# Altium PCB Stlink.PcbDoc
Units mm, origin at the board's own origin, x right, y up, seen from the top; angles counter-clockwise.
Board outline 55.65 x 12.8 mm, 2 copper layers (Top Layer, Bottom Layer); 34 components, 32 nets, 118 pads, 87 vias.
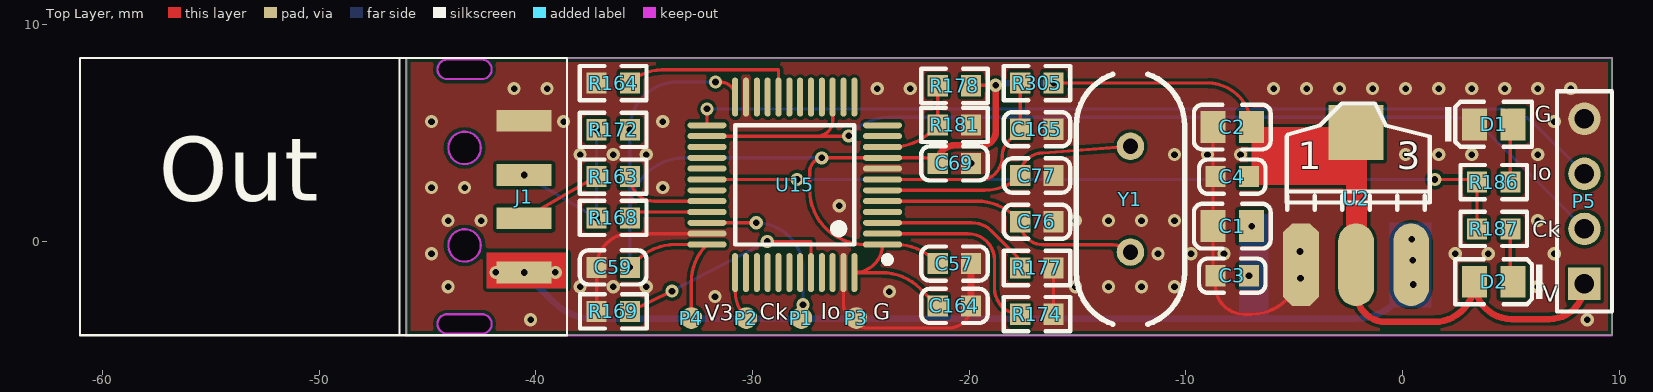
[diagram p0: Top Layer view]
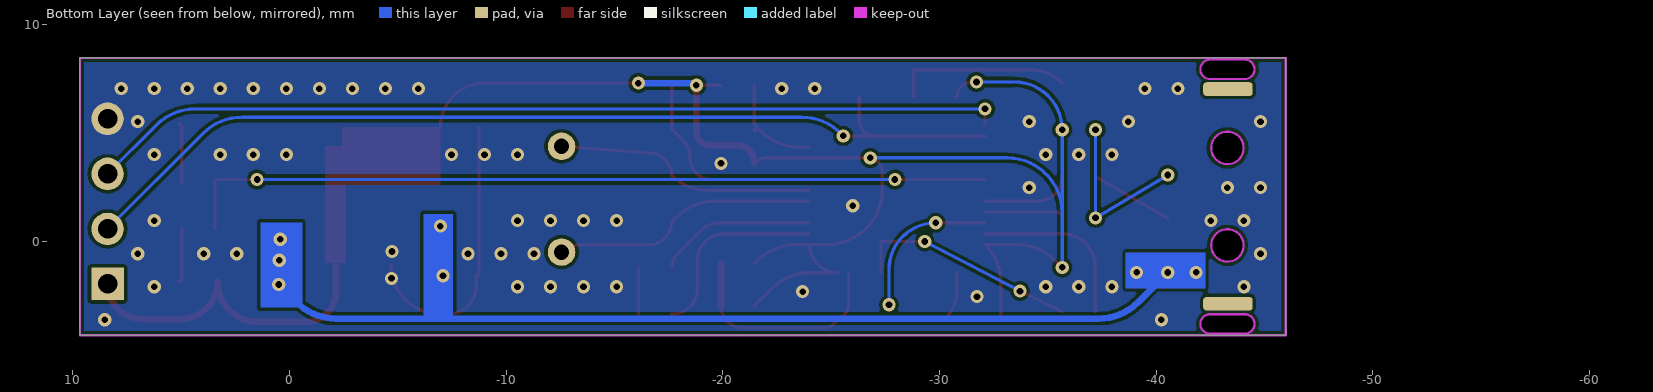
[diagram p1: Bottom Layer view, seen from below]
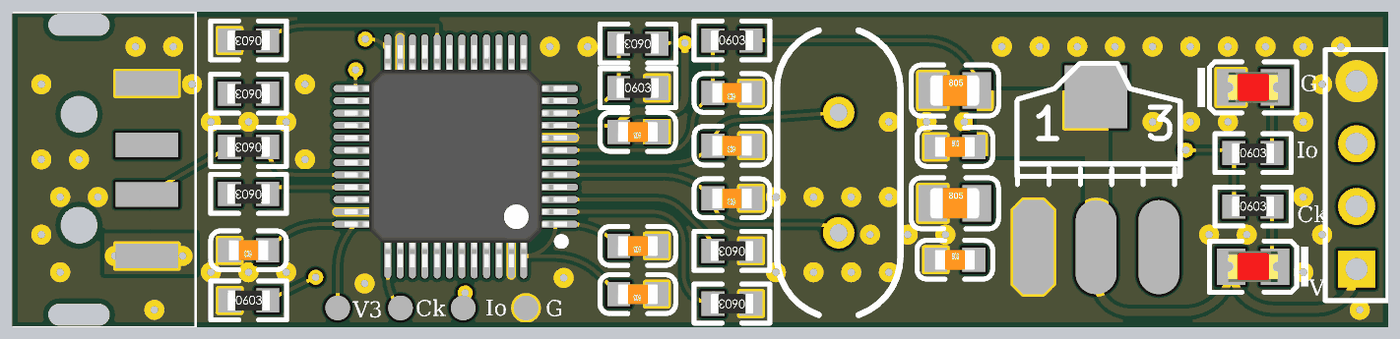
[diagram p2: 3D render of the assembled board from above, using the file's embedded part models]

## Layer stack, top to bottom
Top Solder: solder mask 0.0102, Solder Resist, Dk 3.5
Top Layer: signal copper 0.0356
Dielectric 1: dielectric 0.32, FR-4, Dk 4.8
Bottom Layer: signal copper 0.0356
Bottom Solder: solder mask 0.0102, Solder Resist, Dk 3.5

## Board outline
-45.974,-4.328 9.677,-4.328 9.677,8.472 -45.974,8.472

## Design rules (kind name [scope] priority, off if disabled: settings)
Clearance [All] p1: gap=0.152 ignorepadtopadclearanceinfootprint=FALSE
MinimumSolderMaskSliver [All] p1: minsoldermaskwidth=0
PolygonConnect [All] p1: connectstyle=Direct reliefconductorwidth=0.254 reliefentries=4 polygonreliefangle="90 Angle" airgapwidth=0.254
RoutingVias [All] p1: holewidth=0.305 width=0.61 viastyle="Through Hole" minholewidth=0.305 minwidth=0.61 maxholewidth=0.711 maxwidth=1.27
SilkToSilkClearance [All] p1: silktosilkclearance=0
SilkToSolderMaskClearance [IsPad] p1: minsilkscreentomaskgap=0 clearancetoexposedcopper=TRUE
SolderMaskExpansion [All] p1: expansion=0.102
Width [All] p1: maxlimit=25.4 minlimit=0.152 preferedwidth=0.152
27 further rules are at their usual default settings.

## Components (designator, comment, footprint, x,y, rotation, side; value= is the part's Value field where it differs from the comment)
C1 "10uF" 0805_C -7.849,0.711 r0 top
C2 "10uF" 0805_C -7.849,5.283 r0 top
C3 "100nF" 0603_C -7.849,-1.575 r0 top
C4 "100nF" 0603_C -7.849,2.997 r0 top
C57 "100nF" 0603_C -20.676,-1.016 r180 top
C59 "100nF" 0603_C -36.424,-1.194 r180 top value=10nF
C69 "100nF" 0603_C -20.676,3.607 r180 top
C76 "20pF" 0603_C -16.866,0.914 r180 top
C77 "20pF" 0603_C -16.866,3.048 r180 top
C164 "100nF" 0603_C -20.676,-2.972 r180 top
C165 "100nF" 0603_C -16.866,5.182 r180 top
D1 "红灯 0805" 0805_LED_S1 4.216,5.41 r0 top
D2 "翠绿 0805" 0805_LED_S1 4.216,-1.854 r180 top
J1 "Usba" UsbA -43.282,-0.178 r0 top
P1 "Point" POINT -27.737,-3.531 r0 top
P2 "Point" POINT -30.277,-3.531 r0 top
P3 "Point" POINT -25.197,-3.531 r0 top
P4 "Point" POINT -32.817,-3.531 r0 top
P5 "Header 4" HDR1X4 8.407,-1.956 r90 top
R163 "0" 0603_R -36.424,2.997 r180 top value=1K
R164 "100K" 0603_R -36.424,7.315 r180 top
R168 "0" 0603_R -36.424,1.092 r180 top value=1K
R169 "100K" 0603_R -36.416,-3.226 r0 top
R172 "1K5" 0603_R -36.424,5.156 r180 top value=1K
R174 "10K" 0603_R -16.866,-3.353 r180 top
R177 "[N/A]" 0603_R -16.866,-1.219 r180 top
R178 "4K7" 0603_R -20.676,7.188 r180 top
R181 "4K7" 0603_R -20.676,5.385 r0 top
R186 "100" 0603_R 4.216,2.743 r0 top value=1K
R187 "100" 0603_R 4.216,0.584 r0 top value=1K
R305 "100K" 0603_R -16.866,7.315 r0 top
U2 "AMS1117-3.3" AMS1117 -4.674,-1.065 r0 top
U15 "STM32F103C8T6" LQFP-48_7x7x05P -28.042,2.616 r90 top
Y1 "8MHz" XTAL_US -12.548,4.394 r270 top

## Footprints (in the part's own frame and the unit in brackets; to place one, negate y for a bottom-side part, rotate by r counter-clockwise, add the part's x,y. Pads: shape width x height; smd on the part's side, far side on the other; paste and mask are expansions set on the pad)
0603_C [mm]
  rect 0.93x0.98 smd: 1(-0.77,0) 2(0.77,0)
  silkscreen extent -1.53,-0.79 1.54,0.79, body extent -0.8,-0.4 0.8,0.4, height 0.3
0603_R [mm]
  rect 0.93x0.98 smd: 1(-0.77,0) 2(0.77,0)
  silkscreen extent -1.53,-0.79 1.54,0.79, body extent -0.85,-0.4 0.85,0.4, height 0.56
0805_C [mm]
  rect 1.16x1.47 smd: 1(-0.89,0) 2(0.89,0)
  silkscreen extent -1.77,-1.04 1.77,1.04, body extent -1,-0.62 1,0.63, height 0.77
0805_LED_S1 [mm]
  rect 1.16x1.47 smd: A(0.89,0) K(-0.89,0)
  silkscreen extent -2.24,-1.04 1.77,1.03, body extent -1.01,-0.62 1.01,0.62, height 1.1
AMS1117 [mil]
  oct 65x150 smd: 1(0.03,-0.06)
  oval 65x150 smd: 2(100.03,-0.06) 3(200.03,-0.06)
  rect 100x100 smd: 4(100.03,239.94)
  silkscreen extent -26,100 234,293
HDR1X4 [mm] "Connector; Header; 4 Position"
  rect 1.5x1.5 hole 0.9: 1(0,0)
  round 1.5 hole 0.9: 2(2.54,0) 3(5.08,0) 4(7.62,0)
  silkscreen extent -1.27,-1.27 8.89,1.27
LQFP-48_7x7x05P [mm]
  oval 0.28x1.8 smd mask+0.051: 1(-2.75,-4.05) 2(-2.25,-4.05) 3(-1.75,-4.05) 4(-1.25,-4.05) 5(-0.75,-4.05) 6(-0.25,-4.05) 7(0.25,-4.05) 8(0.75,-4.05) 9(1.25,-4.05) 10(1.75,-4.05) 11(2.25,-4.05) 12(2.75,-4.05) 25(2.75,4.05) 26(2.25,4.05) 27(1.75,4.05) 28(1.25,4.05) 29(0.75,4.05) 30(0.25,4.05) 31(-0.25,4.05) 32(-0.75,4.05) 33(-1.25,4.05) 34(-1.75,4.05) 35(-2.25,4.05) 36(-2.75,4.05)
  oval 1.8x0.28 smd mask+0.051: 13(4.05,-2.75) 14(4.05,-2.25) 15(4.05,-1.75) 16(4.05,-1.25) 17(4.05,-0.75) 18(4.05,-0.25) 19(4.05,0.25) 20(4.05,0.75) 21(4.05,1.25) 22(4.05,1.75) 23(4.05,2.25) 24(4.05,2.75) 37(-4.05,2.75) 38(-4.05,2.25) 39(-4.05,1.75) 40(-4.05,1.25) 41(-4.05,0.75) 42(-4.05,0.25) 43(-4.05,-0.25) 44(-4.05,-0.75) 45(-4.05,-1.25) 46(-4.05,-1.75) 47(-4.05,-2.25) 48(-4.05,-2.75)
  silkscreen extent -3.6,-4.42 2.75,2.75, body extent -4.5,-4.5 4.5,4.5, height 1.6
POINT [mm]
  round 1 smd: 1(0,0)
UsbA [mm]
  rect 2.54x1 smd: 1(2.75,-1.25) 2(2.75,1.25) 3(2.75,3.25) 4(2.75,5.75)
  Keep-Out Layer circle w0.102: c0,0 r0.75
  Keep-Out Layer circle w0.102: c0,4.5 r0.75
  Keep-Out Layer board cut-out: -0.8,7.675 0.8,7.675 0.995,7.72 1.152,7.844 1.239,8.025 1.239,8.225 1.152,8.406 0.995,8.53 0.8,8.575 0.8,8.575 -0.8,8.575 -0.995,8.53 -1.152,8.406 -1.239,8.225 -1.239,8.025 -1.152,7.844 -0.995,7.72 -0.8,7.675
  Keep-Out Layer board cut-out: 0,3.75 -0.287,3.807 -0.53,3.97 -0.693,4.213 -0.75,4.5 -0.75,4.5 -0.693,4.787 -0.53,5.03 -0.287,5.193 0,5.25 0,5.25 0.287,5.193 0.53,5.03 0.693,4.787 0.75,4.5 0.75,4.5 0.693,4.213 0.53,3.97 0.287,3.807 0,3.75
  Keep-Out Layer board cut-out: 0,-0.75 -0.287,-0.693 -0.53,-0.53 -0.693,-0.287 -0.75,0 -0.75,0 -0.693,0.287 -0.53,0.53 -0.287,0.693 0,0.75 0,0.75 0.287,0.693 0.53,0.53 0.693,0.287 0.75,0 0.75,0 0.693,-0.287 0.53,-0.53 0.287,-0.693 0,-0.75
  Keep-Out Layer board cut-out: -0.8,-4.075 -0.995,-4.03 -1.152,-3.906 -1.239,-3.725 -1.239,-3.525 -1.152,-3.344 -0.995,-3.22 -0.8,-3.175 -0.8,-3.175 0.8,-3.175 0.995,-3.22 1.152,-3.344 1.239,-3.525 1.239,-3.725 1.152,-3.906 0.995,-4.03 0.8,-4.075 0.8,-4.075 0.8,-4.075
  Keep-Out Layer lines w0.102: -0.8,-4.075 cw(c-0.8,-3.625) -0.8,-3.175 0.8,-3.175 cw(c0.8,-3.625) 0.8,-4.075 -0.8,-4.075 ; -0.8,7.675 cw(c-0.8,8.125) -0.8,8.575 0.8,8.575 cw(c0.8,8.125) 0.8,7.675 -0.8,7.675
  silkscreen extent -17.75,-4.15 4.72,8.65
XTAL_US [mil]
  round 50 hole 28: 1(0,0) 2(192.13,0)
  silkscreen extent -131,-98 323,98

## Part data
C1 C2: library part "0805 10uF (106) 10% 25V", "贴片电容", Package=0805, SuppliersPartNumber=C15850, ComponentLink1Description=供应商链接, ComponentLink1URL=http://www.szlcsc.com/product/details_16532.html, Supplier=LC
C3 C4: library part "0603 100nF (104) 10% 50V", "贴片电容", Package=0603, SuppliersPartNumber=C14663, ComponentLink1Description=供应商链接, ComponentLink1URL=http://www.szlcsc.com/product/details_15331.html, Supplier=LC
C57 C69 C164 C165: library part CAP
C59 C76 C77: library part Cap, "Capacitor", Published=8-Jun-2000, Publisher="Altium Limited"
  C59: Revision="July-2002: Re-released for DXP Platform."
  C76 C77: LatestRevisionDate=17-Jul-2002, LatestRevisionNote="Re-released for DXP Platform.", PackageReference=RAD-0.3
D1: library part "0805 红灯", "发光二极管", Package=0805, SuppliersPartNumber=C2295, ComponentLink1Description=供应商链接, ComponentLink1URL=http://www.szlcsc.com/product/details_2668.html, Supplier=LC
D2: library part "0805 翠绿", "发光二极管", Package=0805, SuppliersPartNumber=C2297, ComponentLink1Description=供应商链接, ComponentLink1URL=http://www.szlcsc.com/product/details_2670.html, Supplier=LC
P5: "Header, 4-Pin", LatestRevisionDate=17-Jul-2002, LatestRevisionNote="Re-released for DXP Platform.", Publisher="Altium Limited"
R163 R168 R172 R186 R187: library part Res1, "Resistor", Published=8-Jun-2000, Publisher="Altium Limited", Revision="July-2002: Re-released for DXP Platform."
R164 R169 R178 R181 R305: library part RES1
R174 R177: library part R, Bottom=30, Right=20
U2: library part AMS1117
U15: library part STM32F10x(48pin)
Y1: library part XTAL, "Crystal Oscillator", LatestRevisionDate=17-Jul-2002, LatestRevisionNote="Re-released for DXP Platform.", Published=8-Jun-2000, Publisher="Altium Limited"

## Free pads (board coordinates)
  rrect50% 2.286x0.635 smd far side: 1(-43.307,7.036) 2(-43.307,-2.87)

## Via types
v1: diameter 0.61, hole 0.305, Top Layer to Bottom Layer, 87 vias

## Nets (pads, with @x,y where several pads share a name; then routed paths per layer and width w, separated by ;. In a path a pad name is that pad's centre, name@x,y a point inside that pad or via, vN(x,y) a via of type N, cw(c..) or ccw(c..) an arc to the next point about the centre after c; other vN are vias at no path point)
+3V3: C2.2 C4.2 C57.2 C59.1 C69.2 C164.2 D2.A P4.1 P5.1 R172.1 R178.1 R305.2 U2.2 U2.4 U15.1 U15.9 U15.24 U15.36 U15.48 | length 87.3
  Top Layer w0.152: v1(-35.654,-1.194) -35.338,-0.878 cw(c-33.541,-2.674) -33.541,-0.134 U15.36 ccw(c-30.341,-1.885) -32.817,-1.885 P4.1 ; v1(-31.699,7.366) -31.491,7.366 cw(c-31.491,6.666) U15.24 ; C164.2 -22.24,-2.178 ccw(c-24.036,-3.974) -24.036,-1.434 U15.48 ccw(c-25.292,-0.134) U15.1 ; C57.2 -21.584,-0.878 ccw(c-23.38,-2.674) -23.38,-0.134 U15.1 ; C69.2 ccw(c-22.072,2.981) -22.072,3.866 U15.9 -26.69,3.866 ccw(c-26.69,3.2) -27.356,3.2 -27.356,2.406 ccw(c-24.816,2.406) -24.816,-0.134 U15.1 ; R178.1 cw(c-19.88,7.188) -19.88,7.214 v1(-18.771,7.214) ; v1(-16.096,7.315) -8.991,7.315 cw(c-8.991,5.283) C2.2
  Top Layer w0.305: C69.2 -21.446,3.65 cw(c-20.65,3.65) -20.65,4.445 -19.38,4.445 ccw(c-19.38,5.055) -18.771,5.055 v1(-18.771,7.214) ; U2.2 -2.134,-2.337 ccw(c-0.762,-2.337) -0.762,-3.708 1.472,-3.708 ccw(c1.472,-1.854) D2.A ccw(c5.054,-1.854) 5.054,-3.581 6.782,-3.581 ccw(c6.782,-1.956) P5.1
  Bottom Layer w0.152: v1(-35.654,-1.194) -35.654,1.321 ; v1(-31.699,7.366) -33.444,7.366 ccw(c-33.444,5.156) v1(-35.654,5.156) -35.654,1.321 ; v1(-26.797,3.861) -33.114,3.861 ccw(c-33.114,1.321) -35.654,1.321
  Bottom Layer w0.305: v1(-18.771,7.214) cw(c-18.669,7.214) -18.669,7.315 v1(-16.096,7.315)
AIN_1: R178.2 R181.1 U15.10 | length 4.7
  Top Layer w0.152: U15.10 -23.516,4.366 ccw(c-23.516,6.906) -21.72,5.11 R181.1 R178.2 ; R181.1@-21.492,5.11 R181.1@-21.446,5.156
GND: C1.1 C2.1 C3.1 C4.1 C57.1 C59.2 C69.1 C76.1 C77.1 C164.1 C165.1 D1.K J1.4 P3.1 P5.4 R164.2 R169.1 R174.1 R177.1 R181.2 U2.1 U15.8 U15.23 U15.35 U15.47 | length 34.1
  Top Layer w0.152: R169.1 -37.186,-1.194 C59.2 cw(c-35.634,-1.194) -35.634,0.366 U15.35 ; U15.47 -25.792,-2.936 ccw(c-25.197,-2.936) P3.1 ccw(c-24.74,-3.531) -24.74,-3.988 -20.922,-3.988 ccw(c-20.922,-2.972) C164.1 ; R174.1 R177.1 ; C2.1 C1.1 -8.739,-1.455 ccw(c-8.619,-1.455) C3.1 -8.619,-2.049 ccw(c-7.315,-2.049) -7.315,-3.353 -6.96,-3.353 ccw(c-6.96,-1.067) U2.1
  Top Layer w0.305: C164.1 C57.1
  other v1: -40.234,-3.607 8.534,-3.607 -31.725,-2.54 -23.673,-2.311 -44.044,-2.083 -37.948,-2.083 -36.424,-2.083 -34.9,-2.083 -15.088,-2.083 -13.564,-2.083 -12.04,-2.083 -10.516,-2.083 6.248,-2.083 -4.699,-1.702 -44.806,-0.559 -11.278,-0.559 -9.754,-0.559 -8.23,-0.559 2.438,-0.559 3.962,-0.559 7.01,-0.559 -4.724,-0.457 -44.044,0.965 -42.52,0.965 -15.088,0.965 -13.564,0.965 -12.04,0.965 -10.516,0.965 6.248,0.965 -25.984,1.651 -44.806,2.489 -43.282,2.489 -34.138,2.489 -19.906,3.607 -37.948,4.013 -36.424,4.013 -34.9,4.013 -10.516,4.013 -8.992,4.013 -7.468,4.013 0.152,4.013 1.676,4.013 3.2,4.013 6.248,4.013 -44.806,5.537 -38.71,5.537 -34.138,5.537 7.01,5.537 -40.996,7.061 -39.472,7.061 -24.232,7.061 -22.708,7.061 -5.944,7.061 -4.42,7.061 -2.896,7.061 -1.372,7.061 0.152,7.061 1.676,7.061 3.2,7.061 4.724,7.061 6.248,7.061 7.772,7.061
LED_STLINK: R186.1 R187.1 U15.30 | length 37.8
  Top Layer w0.152: U15.30 v1(-27.936,2.866) ; v1(1.503,2.866) 3.323,2.866 cw(c3.323,2.743) R186.1 R187.1
  Bottom Layer w0.152: v1(-27.936,2.866) v1(1.503,2.866)
MCO: U15.29
NetD1_A: D1.A R186.2 | length 2.7
  Top Layer w0.152: R186.2 4.986,5.29 cw(c5.106,5.29) D1.A
NetD2_K: D2.K R187.2 | length 2.5
  Top Layer w0.152: R187.2 4.986,-1.734 ccw(c5.106,-1.734) D2.K
NetJ1_2: J1.2 R163.2 | length 3.9
  Top Layer w0.152: J1.2 R163.2
NetJ1_3: J1.3 R168.2 R172.2 | length 7.9
  Bottom Layer w0.152: v1(-40.532,3.072) v1(-37.194,1.092) v1(-37.194,5.156)
NetR164_1: R164.1 U15.20 | length 8.3
  Top Layer w0.152: R164.1 cw(c-34.182,5.843) -34.182,7.925 -28.792,7.925 U15.20
NetR169_2: R169.2 U15.44 | length 10.6
  Top Layer w0.152: R169.2 v1(-33.706,-2.286) ; v1(-29.312,0) -27.292,0 U15.44
  Bottom Layer w0.152: v1(-33.706,-2.286) v1(-29.312,0)
NetR174_2: R174.2 U15.2 | length 9
  Top Layer w0.152: U15.2 -20.051,0.366 cw(c-20.051,-0.864) -18.821,-0.864 -18.821,-2.167 ccw(c-17.636,-2.167) R174.2
NetR177_2: R177.2 U15.3 | length 7.4
  Top Layer w0.152: U15.3 -19.875,0.866 cw(c-19.875,-0.444) -18.948,0.483 -17.911,-0.555 cw(c-18.575,-1.219) R177.2
OSC_IN: C76.2 U15.5 Y1.2 | length 12.4
  Top Layer w0.152: U15.5 -19.64,1.866 cw(c-19.64,-0.674) -17.843,1.122 C76.2 ccw(c-16.569,0.914) -16.569,-0.152 -13.353,-0.152 cw(c-13.353,-1.291) Y1.2
OSC_OUT: C77.2 U15.6 Y1.1 | length 12.2
  Top Layer w0.152: U15.6 -19.282,2.366 ccw(c-19.282,4.694) C77.2 cw(c-16.594,3.048) -16.594,4.089 Y1.1
STL_USB_DM: R163.1 U15.32 | length 4.2
  Top Layer w0.152: R163.1 ccw(c-34.523,2.997) -34.523,1.866 U15.32
STL_USB_DP: R168.1 U15.33 | length 3.7
  Top Layer w0.152: R168.1 cw(c-35.38,1.092) -35.38,1.366 U15.33
STM_JTCK_SWCLK: P2.1 U15.37 | length 2.2
  Top Layer w0.152: U15.37 -30.792,-2.288 ccw(c-29.034,-2.288) P2.1
STM_JTDI: U15.38
STM_JTDO: U15.39
STM_JTMS_SWDIO: P1.1 U15.34 | length 7.3
  Top Layer w0.152: U15.34 v1(-29.82,0.866)
  Bottom Layer w0.152: v1(-29.82,0.866) cw(c-29.82,-1.293) -27.661,-1.293 v1(-27.661,-2.921)
STM_RST: C165.2 R305.1 U15.7 | length 9.8
  Top Layer w0.152: U15.7 -19.383,2.866 ccw(c-19.383,3.66) -18.821,3.099 ccw(c-19.68,3.957) -18.466,3.957 cw(c-17.514,3.957) -18.187,4.63 C165.2 R305.1
SWIM_PU_CTRL: U15.4
T_JRST: U15.19
T_JTCK: P5.2 U15.15 U15.26 | length 45
  Top Layer w0.152: U15.26 -27.013,4.866 ; U15.15 -26.292,5.588 cw(c-27.013,5.588) -27.013,4.866 ; v1(-25.552,4.877) cw(c-25.578,4.902) -25.578,4.866 -27.013,4.866
  Bottom Layer w0.152: v1(-25.552,4.877) -25.433,4.996 cw(c-23.637,3.2) -23.637,5.74 2.199,5.74 cw(c2.199,3.2) 3.995,4.996 P5.2
T_JTDI: U15.17
T_JTDO: U15.16
T_JTMS: U15.27
T_NRST: U15.18
T_SWDIO_IN: P5.3 U15.25 | length 42.4
  Top Layer w0.152: U15.25 v1(-32.092,6.121)
  Bottom Layer w0.152: v1(-32.092,6.121) 4.358,6.121 cw(c4.358,3.581) 6.154,5.377 P5.3
T_SWO: U15.31
U5V_ST_LINK: C1.2 C3.2 J1.1 U2.3 | length 43.2
  Bottom Layer w0.305: v1(-40.532,-1.428) -39.147,-2.812 ccw(c-37.351,-1.016) -37.351,-3.556 -2.134,-3.556 ccw(c-2.134,-1.016) v1@0.406,-1.016
  other v1: 0.508,-1.981 -7.079,-1.575 -41.834,-1.422 -39.091,-1.422 0.483,-0.864 0.432,0.102 -6.959,0.711
pads on no net: U15.11 U15.12 U15.13 U15.14 U15.21 U15.22 U15.28 U15.40 U15.41 U15.42 U15.43 U15.45 U15.46

## Polygon pours and split planes (outlines as drawn)
GND on Bottom Layer "GND_L02_P006" (solid, pour order 6): -45.974,8.472 9.677,8.472 9.677,-4.328 -45.974,-4.328
GND on Top Layer "GND_L01_P008" (solid, pour order 8): -45.974,8.472 9.677,8.472 9.677,-4.328 -45.974,-4.328

## Keep-outs
Keep-Out Layer:
  the board outline again, w0.102

## Other copper
Top Layer:
  rectangle net +3V3: -6.959,2.616 -2.413,5.283
  rectangle net +3V3: -2.591,-0.991 -1.626,4.42
  rectangle net U5V_ST_LINK: -42.266,-2.159 -38.557,-0.508
Bottom Layer:
  rectangle net U5V_ST_LINK: -0.584,-3.048 1.346,0.889
  rectangle net U5V_ST_LINK: -7.544,-3.556 -6.172,1.27
  rectangle net U5V_ST_LINK: -42.266,-2.159 -38.583,-0.508

## Silkscreen, mask and mechanical layers (free items; w line width, h text height)
Top Overlay:
  text "G" at 6.121,5.258 h1.27
  text "Io" at 5.969,2.565 h1.27
  text "Ck" at 5.994,-0.051 h1.27
  text "V" at 6.477,-3.023 h1.27
  text "Io" at -26.848,-3.835 h1.27
  text "Ck" at -29.667,-3.861 h1.27
  text "G" at -24.409,-3.861 h1.27
  text "V3" at -32.207,-3.912 h1.27

## Text inside footprints (layer, text, board x,y; h text height)
J1: Top Overlay "Out" at -57.404,0.914 h5.08
U2: Top Overlay "1" at -4.826,3.327 h1.27; Top Overlay "3" at -0.254,3.327 h1.27